# Altium PCB PCB.PcbDoc (part 1 of 2)
Units mm, origin at the board's own origin, x right, y up, seen from the top; angles counter-clockwise.
Board outline 50 x 50 mm, 4 copper layers (Top Layer, VCC, GND, Bottom Layer), stack 1.586 mm thick; 85 components, 151 nets, 720 pads, 300 vias.
Unrouted connection lines stored in the file: 6.
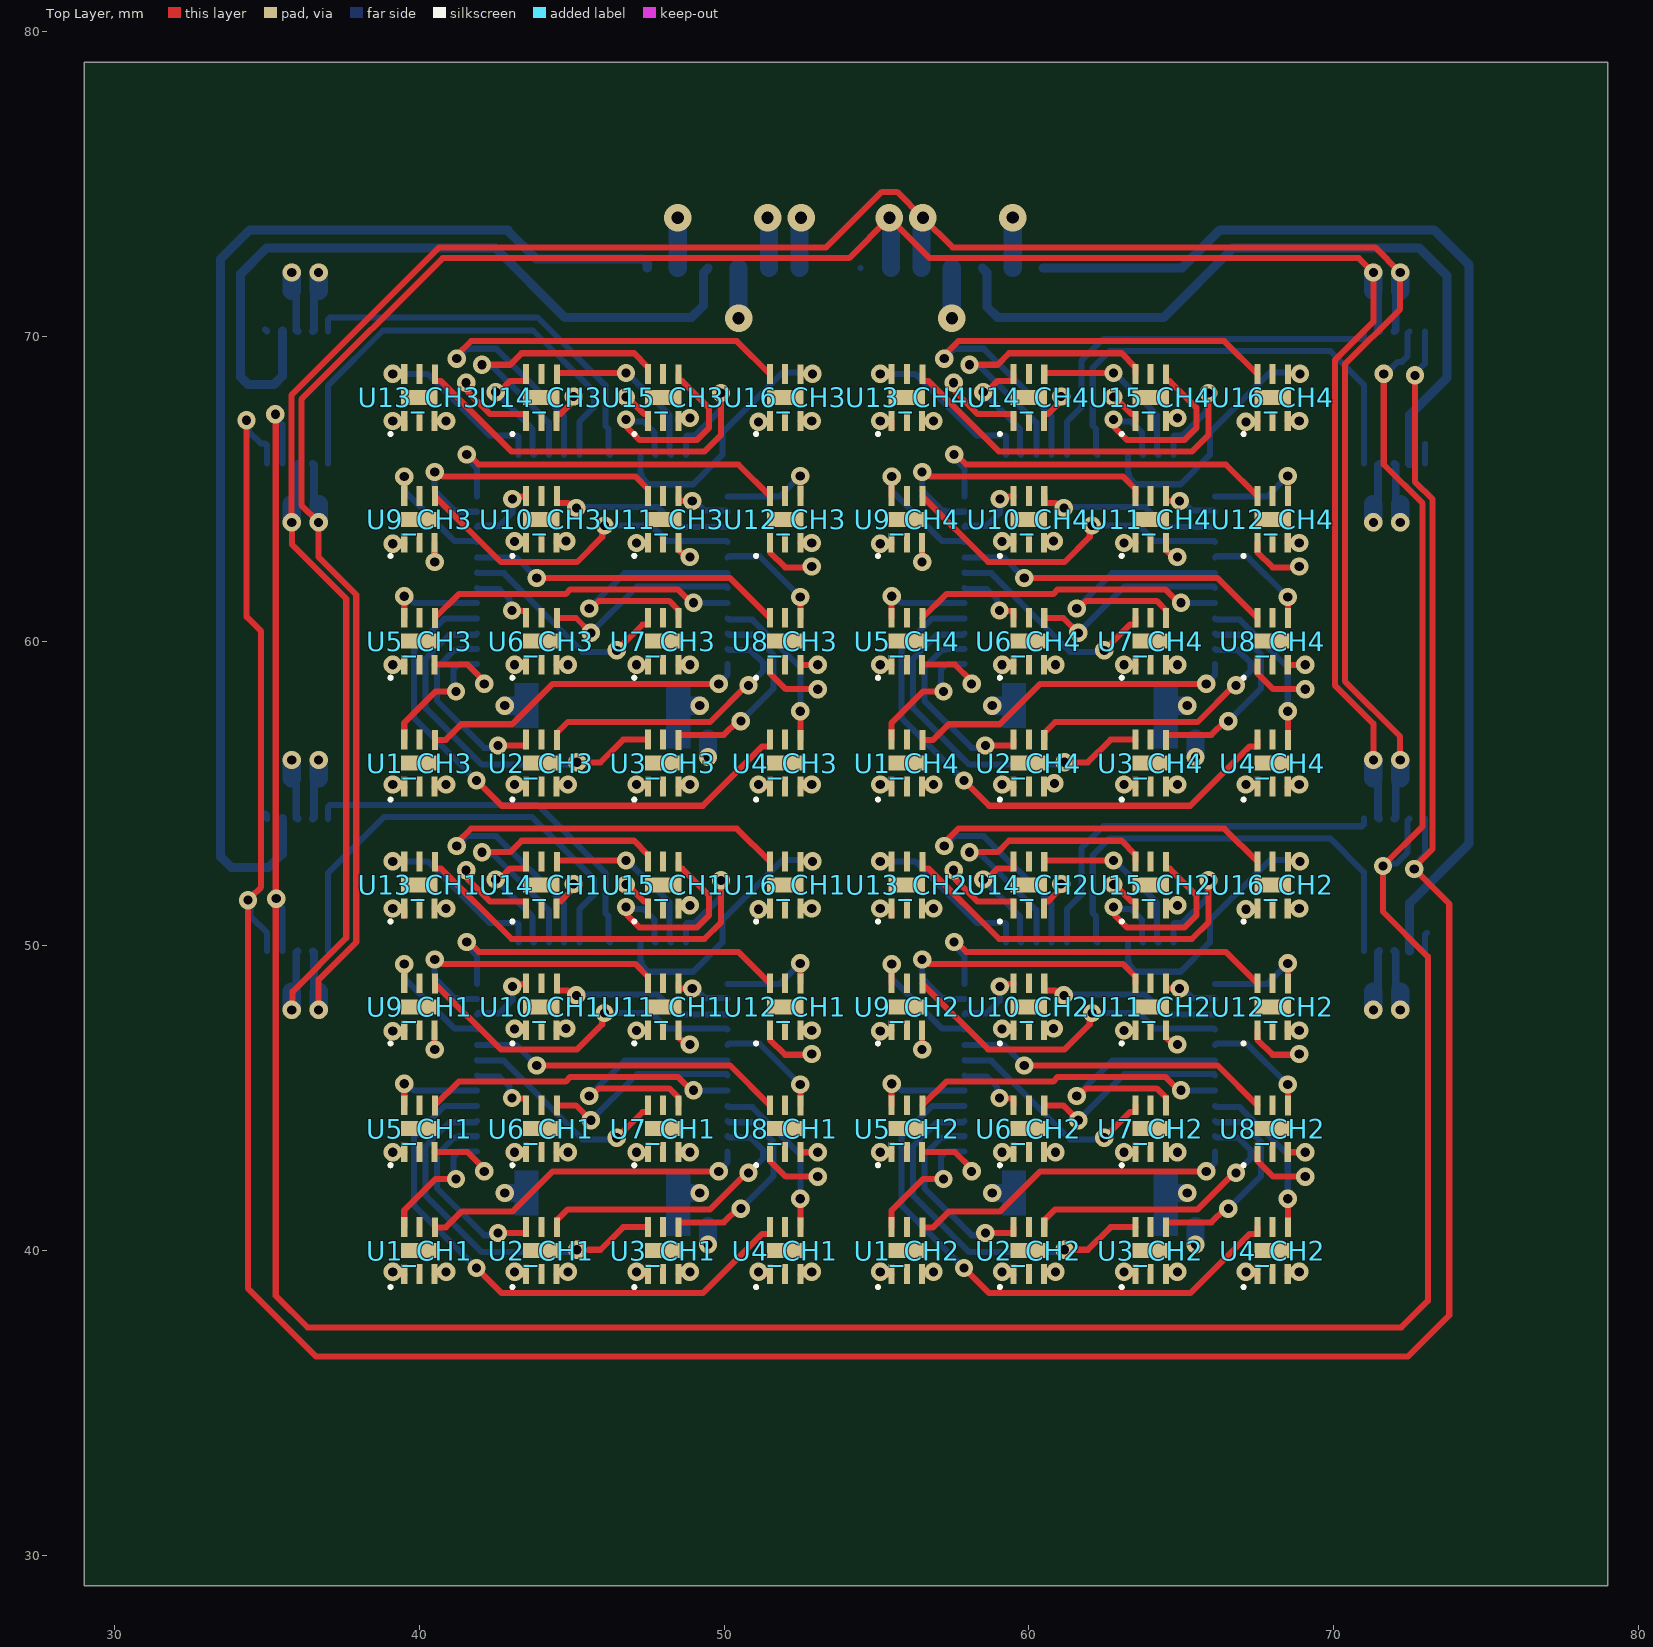
[diagram p0: Top Layer view]
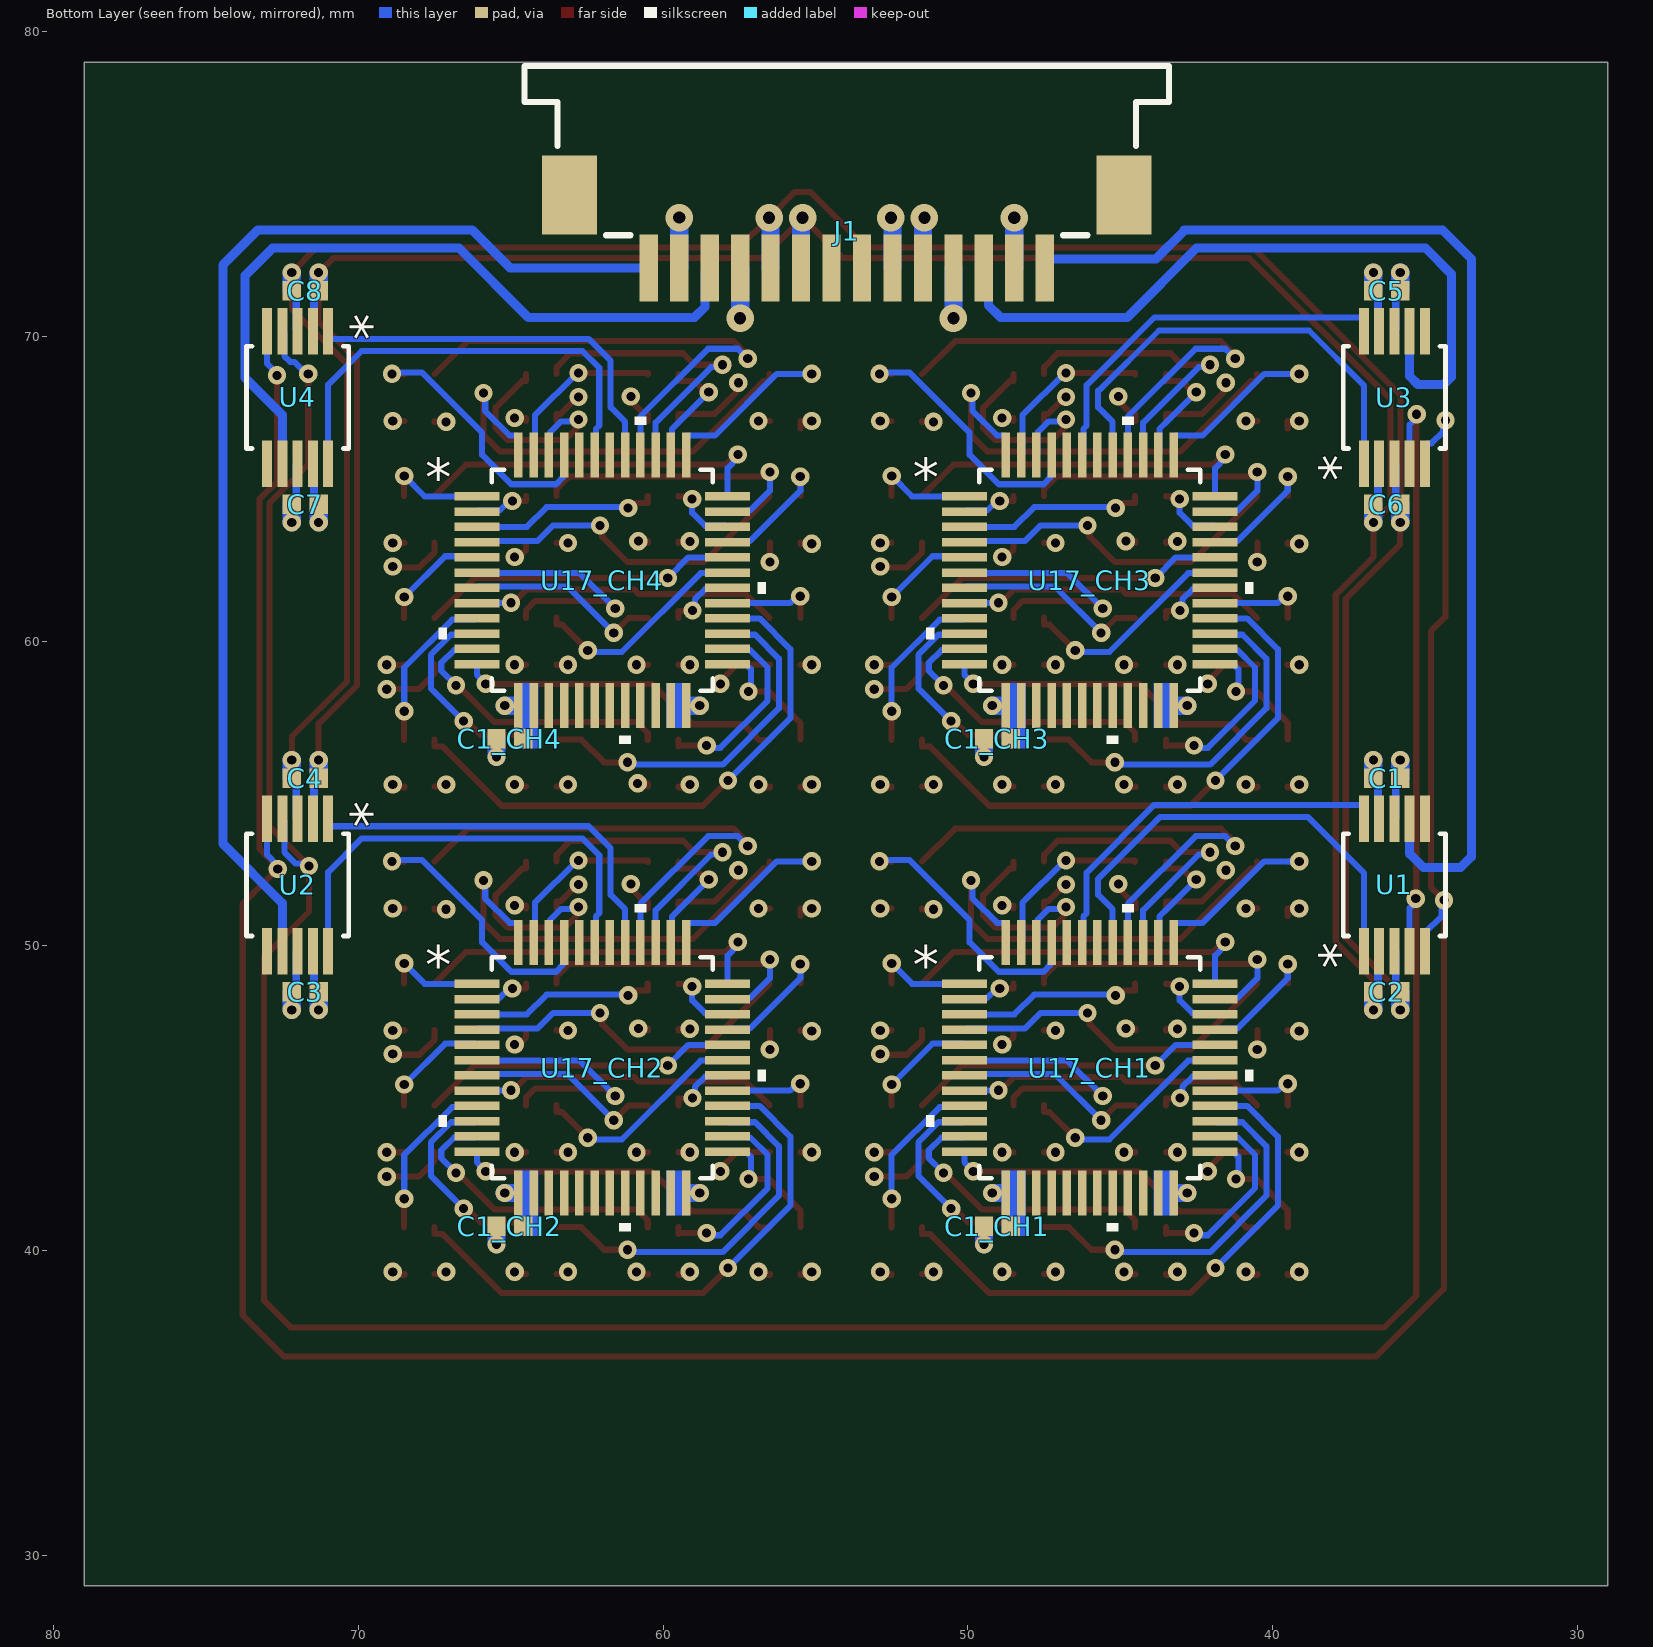
[diagram p1: Bottom Layer view, seen from below]
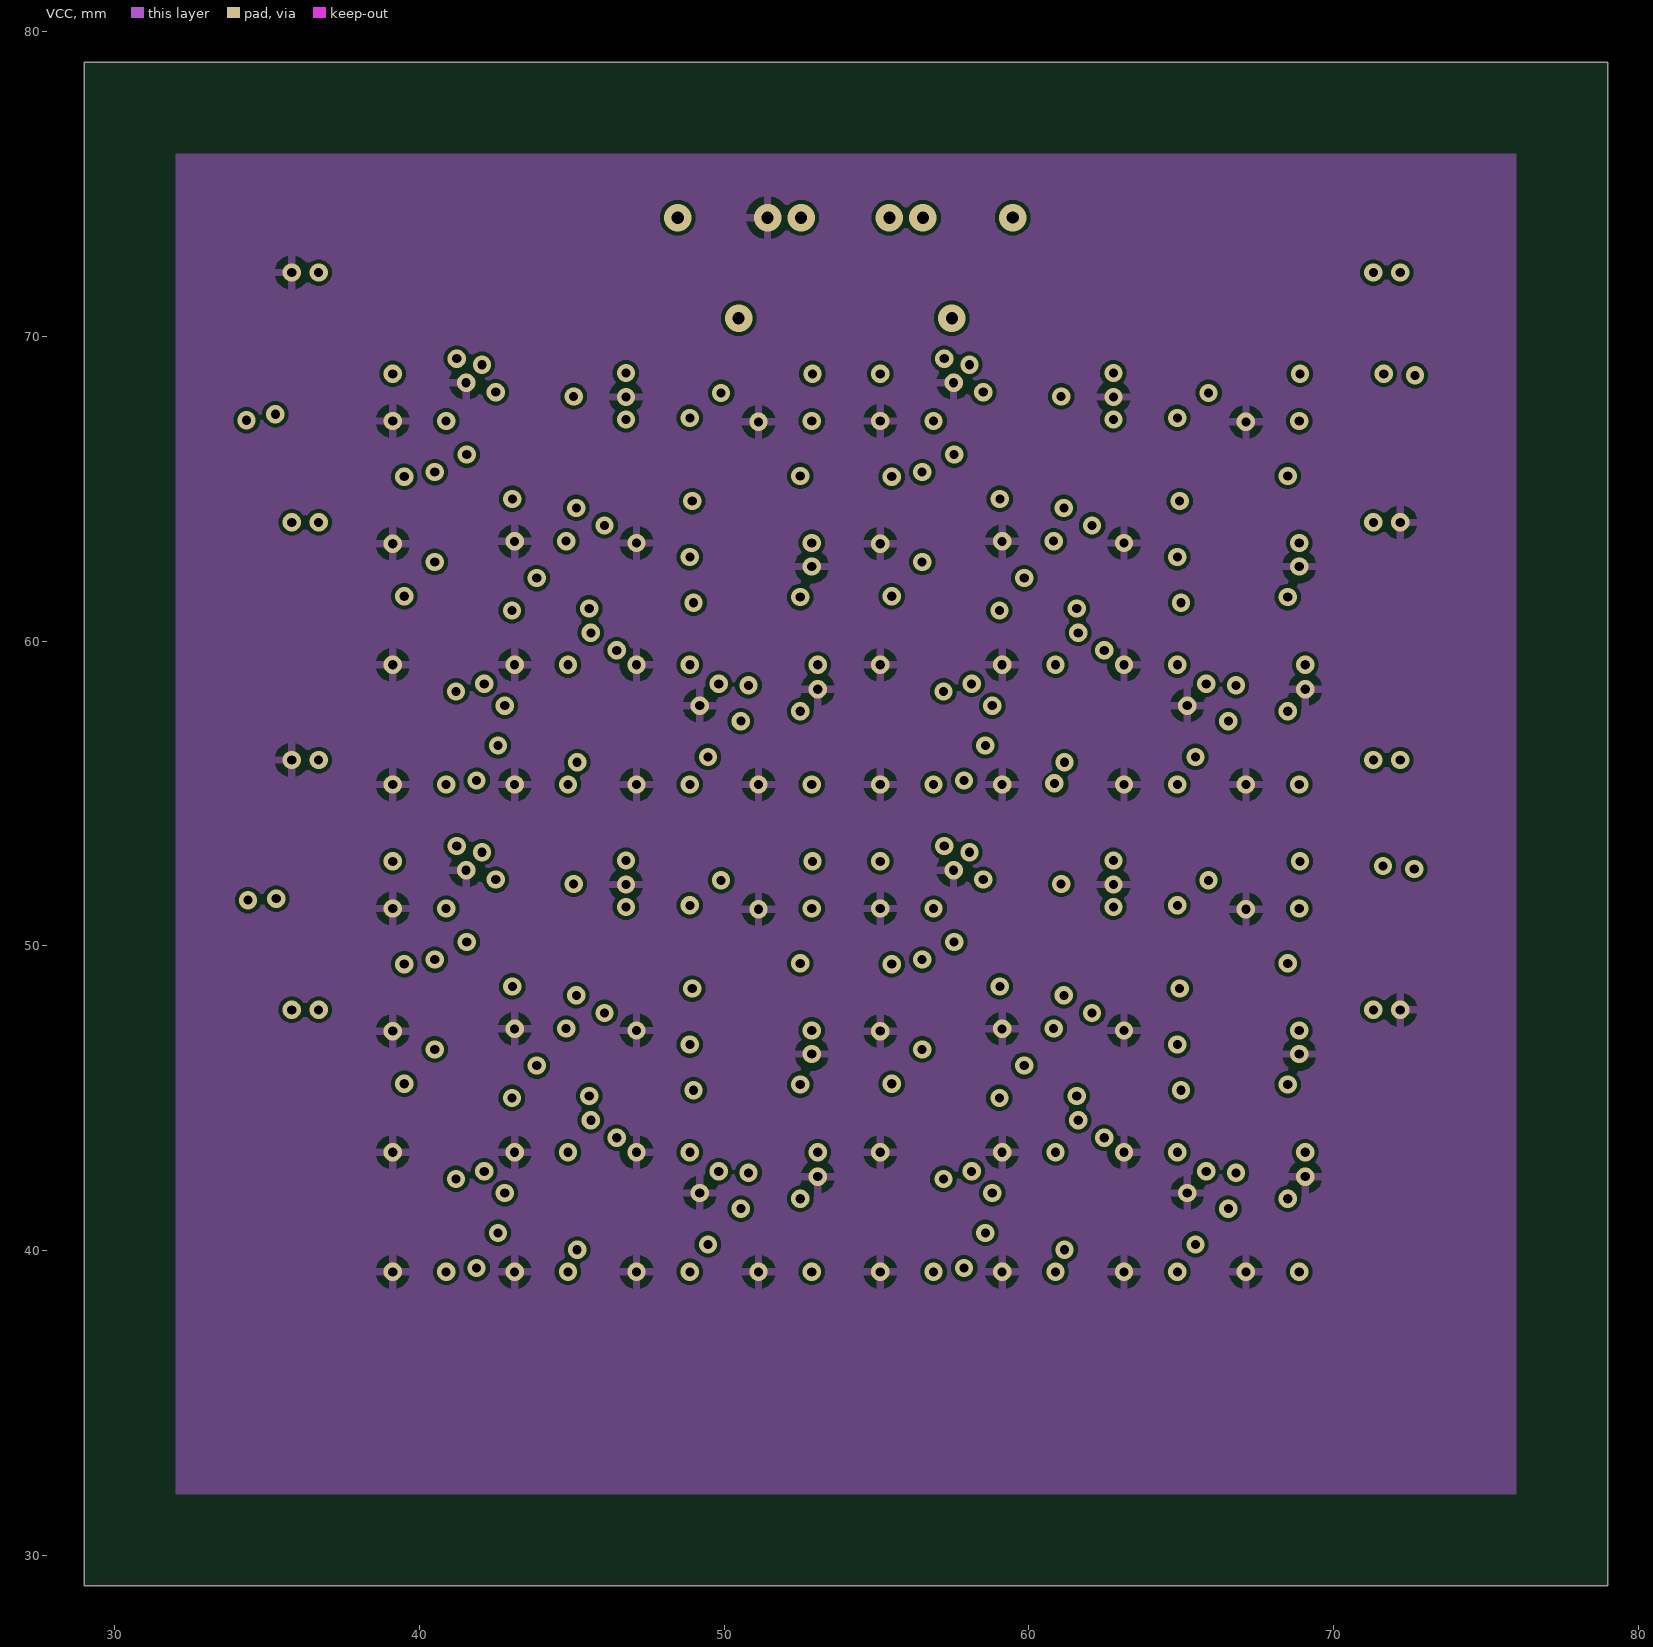
[diagram p2: VCC]
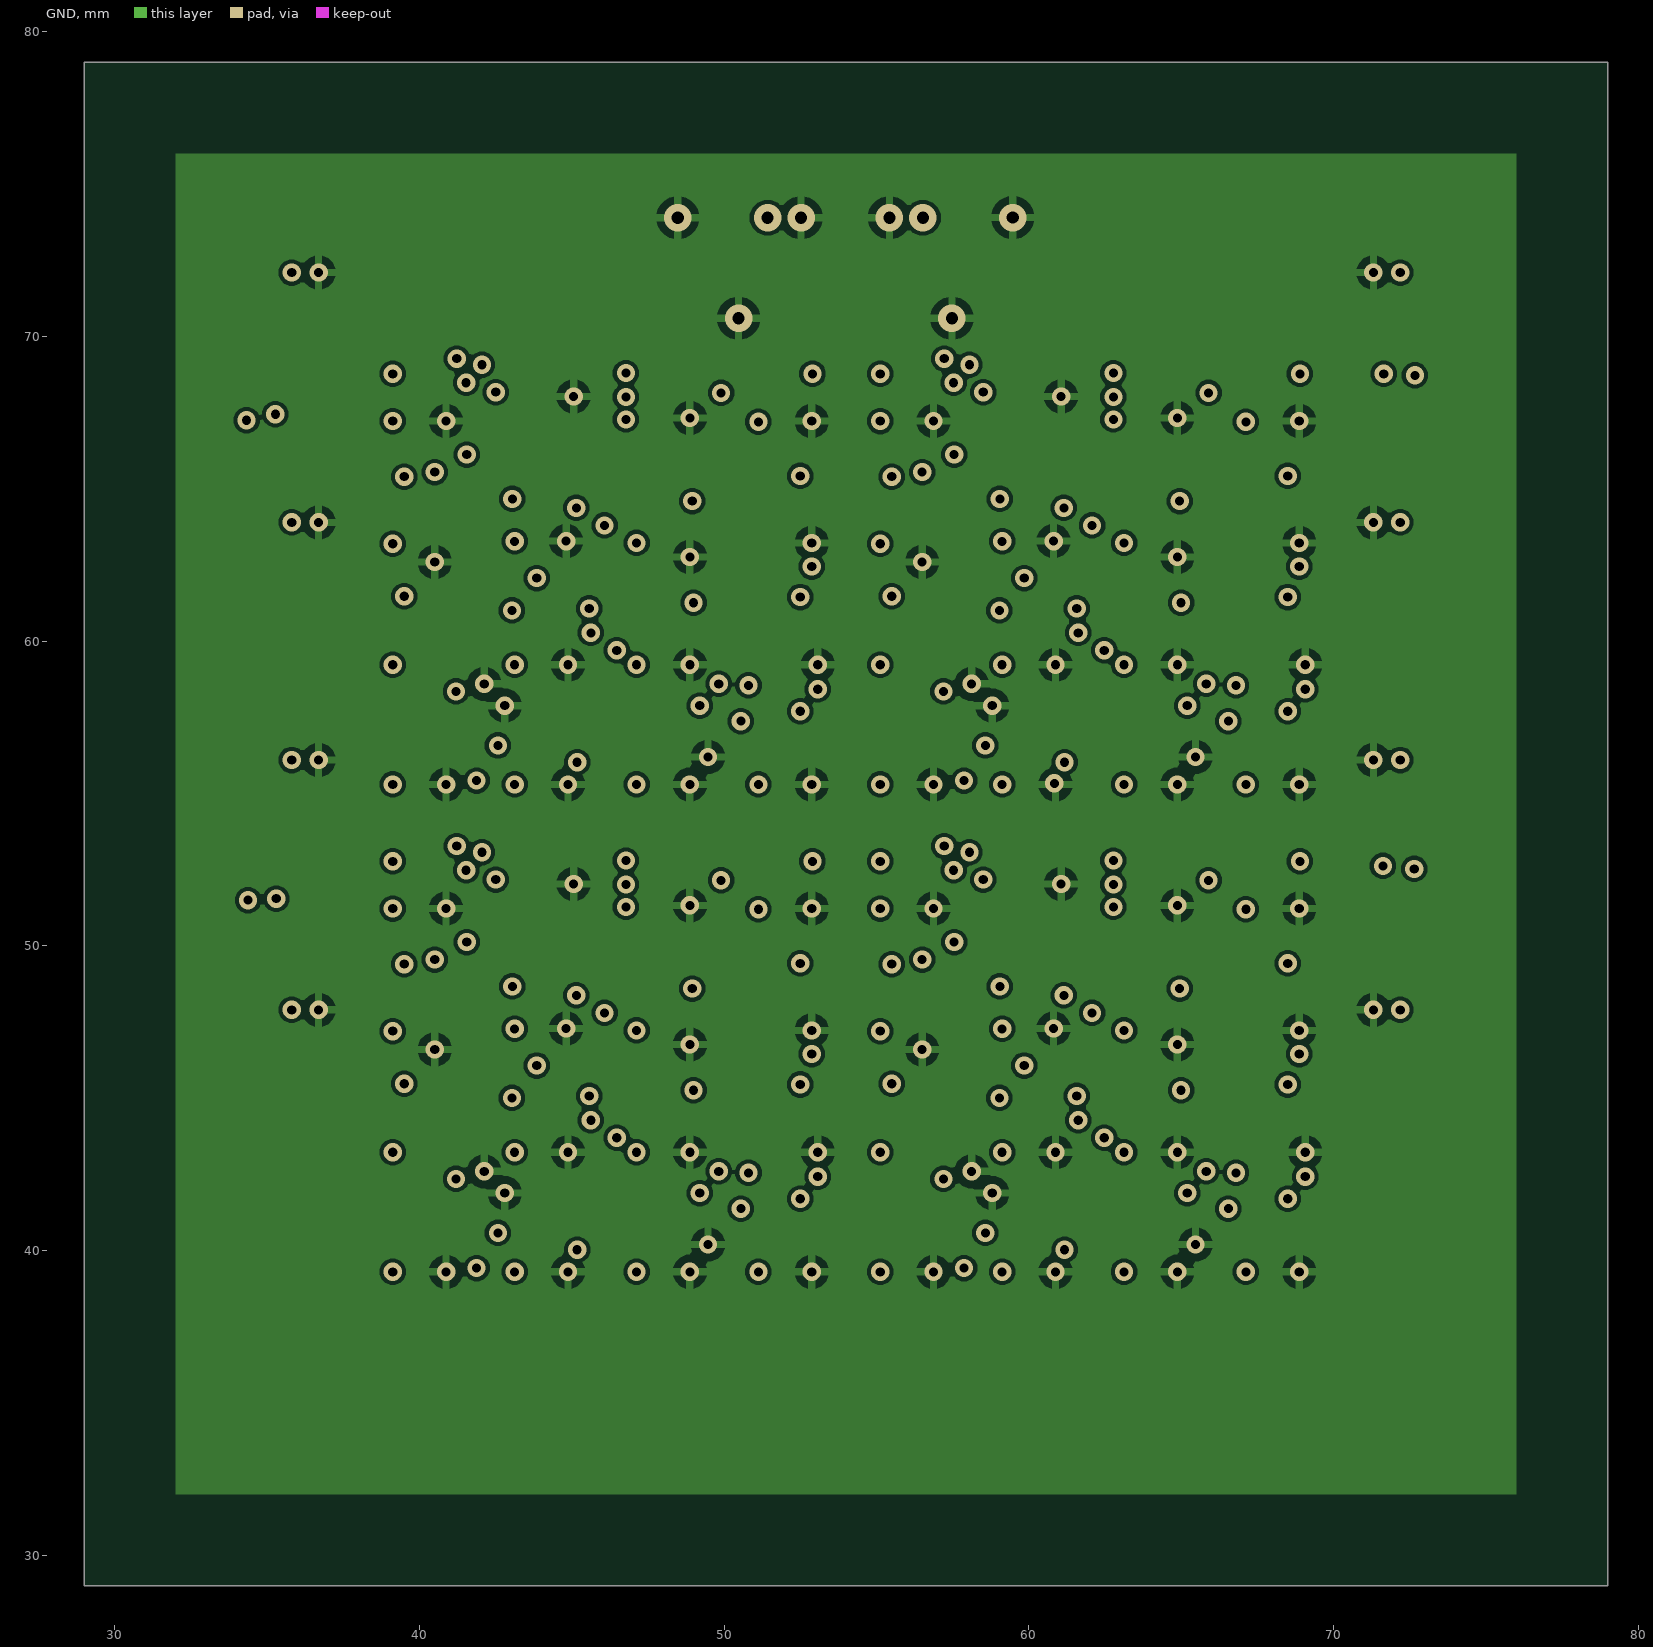
[diagram p3: GND]
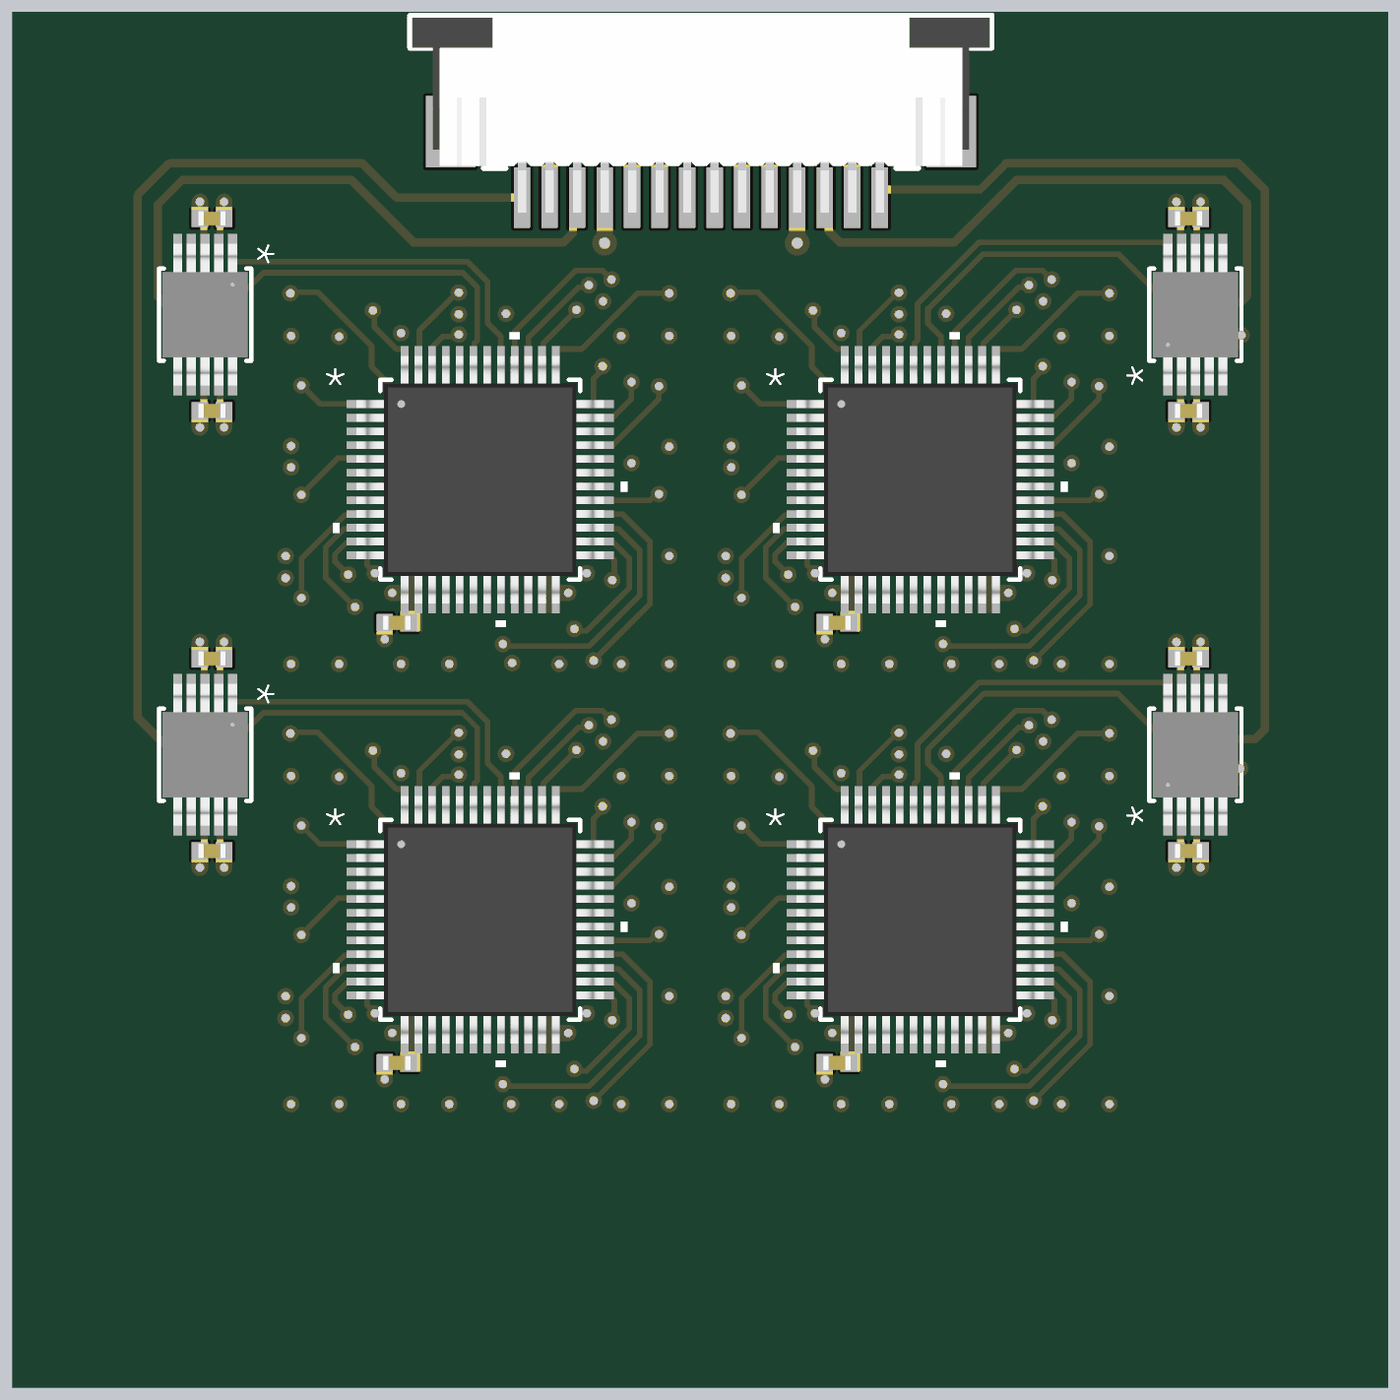
[diagram p5: 3D render of the assembled board from below, using the file's embedded part models]

## Layer stack, top to bottom
Top Solder: solder mask 0.0102, Solder Resist, Dk 3.5
Top Layer: signal copper 0.035
Dielectric 2: prepreg 0.2104, PP-006, Dk 4.6
VCC: signal copper 0.0152
Dielectric 1: dielectric 1.065, FR-4, Dk 4.6
GND: signal copper 0.0152
Dielectric 3: prepreg 0.2104, PP-006, Dk 4.6
Bottom Layer: signal copper 0.035
Bottom Solder: solder mask 0.0102, Solder Resist, Dk 3.5

## Board outline
29,29 29,79 79,79 79,29

## Design rules (kind name [scope] priority, off if disabled: settings)
Clearance [All] p1: gap=0.127 ignorepadtopadclearanceinfootprint=FALSE
HoleSize [All] p1: absolutevalues=TRUE maxlimit=2.54 minlimit=0.2 maxpercent=80.000 minpercent=20.000
PolygonConnect [All] p1: connectstyle=Relief reliefconductorwidth=0.254 reliefentries=4 polygonreliefangle="90 Angle" airgapwidth=0.254
RoomDefinition CH4 [InComponentClass('CH4')] p1: confinementstyle=ConfineIn formatcopy=TRUE lockcomponents=FALSE outline 54,54 70,54 70,70 54,70
RoomDefinition CH1 [InComponentClass('CH1')] p2: confinementstyle=ConfineIn formatcopy=TRUE lockcomponents=FALSE outline 38,38 54,38 54,54 38,54
RoomDefinition CH3 [InComponentClass('CH3')] p3: confinementstyle=ConfineIn formatcopy=TRUE lockcomponents=FALSE outline 38,54 54,54 54,70 38,70
RoomDefinition CH2 [InComponentClass('CH2')] p4: confinementstyle=ConfineIn formatcopy=TRUE lockcomponents=FALSE outline 54,38 70,38 70,54 54,54
RoutingVias [All] p1: holewidth=0.3 width=0.7 viastyle="Through Hole" minholewidth=0.2 minwidth=0.4 maxholewidth=0.711 maxwidth=1.27
SolderMaskExpansion SolderMaskExpansion_Via [IsVia] p1: expansion=0.102 istentingtop=TRUE
SolderMaskExpansion [All] p2: expansion=0.102 istentingtop=FALSE
Width [All] p1: maxlimit=0.7 minlimit=0.1 preferedwidth=0.2
29 further rules are at their usual default settings.

## Classes and differential pairs
component class CT100-array: C1 C2 C3 C4 C5 C6 C7 C8 J1 U1 U2 U3 U4
channel class CT100-channel: CH1 CH2 CH3 CH4
component class CH4: C1_CH4 U1_CH4 U2_CH4 U3_CH4 U4_CH4 U5_CH4 U6_CH4 U7_CH4 U8_CH4 U9_CH4 U10_CH4 U11_CH4 U12_CH4 U13_CH4 U14_CH4 U15_CH4 U16_CH4 U17_CH4
component class CH3: C1_CH3 U1_CH3 U2_CH3 U3_CH3 U4_CH3 U5_CH3 U6_CH3 U7_CH3 U8_CH3 U9_CH3 U10_CH3 U11_CH3 U12_CH3 U13_CH3 U14_CH3 U15_CH3 U16_CH3 U17_CH3
component class CH2: C1_CH2 U1_CH2 U2_CH2 U3_CH2 U4_CH2 U5_CH2 U6_CH2 U7_CH2 U8_CH2 U9_CH2 U10_CH2 U11_CH2 U12_CH2 U13_CH2 U14_CH2 U15_CH2 U16_CH2 U17_CH2
component class CH1: C1_CH1 U1_CH1 U2_CH1 U3_CH1 U4_CH1 U5_CH1 U6_CH1 U7_CH1 U8_CH1 U9_CH1 U10_CH1 U11_CH1 U12_CH1 U13_CH1 U14_CH1 U15_CH1 U16_CH1 U17_CH1

## Components (designator, comment, footprint, x,y, rotation, side; value= is the part's Value field where it differs from the comment)
C1 "0u1" CAP_0402 36.25,55.5 r0 bottom
C1_CH1 "0u1" CAP_0402 49.03,40.8 r180 bottom (schematic designator C1)
C1_CH2 "0u1" CAP_0402 65.03,40.8 r180 bottom (schematic designator C1)
C1_CH3 "0u1" CAP_0402 49.03,56.8 r180 bottom (schematic designator C1)
C1_CH4 "0u1" CAP_0402 65.03,56.8 r180 bottom (schematic designator C1)
C2 "0u1" CAP_0402 36.25,48.5 r0 bottom
C3 "0u1" CAP_0402 71.75,48.5 r180 bottom
C4 "0u1" CAP_0402 71.75,55.5 r180 bottom
C5 "0u1" CAP_0402 36.25,71.5 r0 bottom
C6 "0u1" CAP_0402 36.25,64.5 r0 bottom
C7 "0u1" CAP_0402 71.75,64.5 r180 bottom
C8 "0u1" CAP_0402 71.75,71.5 r180 bottom
J1 "FPC_pitch1_14pos" FPC_pitch1_14pos 53.975,76.1 r0 bottom
U1 "AD8253ARMZ" RM_10_ADI 36,52 r90 bottom
U1_CH1 "CT100" SON_6_CT100 40,40 r90 top (schematic designator U1)
U1_CH2 "CT100" SON_6_CT100 56,40 r90 top (schematic designator U1)
U1_CH3 "CT100" SON_6_CT100 40,56 r90 top (schematic designator U1)
U1_CH4 "CT100" SON_6_CT100 56,56 r90 top (schematic designator U1)
U2 "AD8253ARMZ" RM_10_ADI 72,52 r270 bottom
U2_CH1 "CT100" SON_6_CT100 44,40 r90 top (schematic designator U2)
U2_CH2 "CT100" SON_6_CT100 60,40 r90 top (schematic designator U2)
U2_CH3 "CT100" SON_6_CT100 44,56 r90 top (schematic designator U2)
U2_CH4 "CT100" SON_6_CT100 60,56 r90 top (schematic designator U2)
U3 "AD8253ARMZ" RM_10_ADI 36,68 r90 bottom
U3_CH1 "CT100" SON_6_CT100 48,40 r90 top (schematic designator U3)
U3_CH2 "CT100" SON_6_CT100 64,40 r90 top (schematic designator U3)
U3_CH3 "CT100" SON_6_CT100 48,56 r90 top (schematic designator U3)
U3_CH4 "CT100" SON_6_CT100 64,56 r90 top (schematic designator U3)
U4 "AD8253ARMZ" RM_10_ADI 72,68 r270 bottom
U4_CH1 "CT100" SON_6_CT100 52,40 r90 top (schematic designator U4)
U4_CH2 "CT100" SON_6_CT100 68,40 r90 top (schematic designator U4)
U4_CH3 "CT100" SON_6_CT100 52,56 r90 top (schematic designator U4)
U4_CH4 "CT100" SON_6_CT100 68,56 r90 top (schematic designator U4)
U5_CH1 "CT100" SON_6_CT100 40,44 r90 top (schematic designator U5)
U5_CH2 "CT100" SON_6_CT100 56,44 r90 top (schematic designator U5)
U5_CH3 "CT100" SON_6_CT100 40,60 r90 top (schematic designator U5)
U5_CH4 "CT100" SON_6_CT100 56,60 r90 top (schematic designator U5)
U6_CH1 "CT100" SON_6_CT100 44,44 r90 top (schematic designator U6)
U6_CH2 "CT100" SON_6_CT100 60,44 r90 top (schematic designator U6)
U6_CH3 "CT100" SON_6_CT100 44,60 r90 top (schematic designator U6)
U6_CH4 "CT100" SON_6_CT100 60,60 r90 top (schematic designator U6)
U7_CH1 "CT100" SON_6_CT100 48,44 r90 top (schematic designator U7)
U7_CH2 "CT100" SON_6_CT100 64,44 r90 top (schematic designator U7)
U7_CH3 "CT100" SON_6_CT100 48,60 r90 top (schematic designator U7)
U7_CH4 "CT100" SON_6_CT100 64,60 r90 top (schematic designator U7)
U8_CH1 "CT100" SON_6_CT100 52,44 r90 top (schematic designator U8)
U8_CH2 "CT100" SON_6_CT100 68,44 r90 top (schematic designator U8)
U8_CH3 "CT100" SON_6_CT100 52,60 r90 top (schematic designator U8)
U8_CH4 "CT100" SON_6_CT100 68,60 r90 top (schematic designator U8)
U9_CH1 "CT100" SON_6_CT100 40,48 r90 top (schematic designator U9)
U9_CH2 "CT100" SON_6_CT100 56,48 r90 top (schematic designator U9)
U9_CH3 "CT100" SON_6_CT100 40,64 r90 top (schematic designator U9)
U9_CH4 "CT100" SON_6_CT100 56,64 r90 top (schematic designator U9)
U10_CH1 "CT100" SON_6_CT100 44,48 r90 top (schematic designator U10)
U10_CH2 "CT100" SON_6_CT100 60,48 r90 top (schematic designator U10)
U10_CH3 "CT100" SON_6_CT100 44,64 r90 top (schematic designator U10)
U10_CH4 "CT100" SON_6_CT100 60,64 r90 top (schematic designator U10)
U11_CH1 "CT100" SON_6_CT100 48,48 r90 top (schematic designator U11)
U11_CH2 "CT100" SON_6_CT100 64,48 r90 top (schematic designator U11)
U11_CH3 "CT100" SON_6_CT100 48,64 r90 top (schematic designator U11)
U11_CH4 "CT100" SON_6_CT100 64,64 r90 top (schematic designator U11)
U12_CH1 "CT100" SON_6_CT100 52,48 r90 top (schematic designator U12)
U12_CH2 "CT100" SON_6_CT100 68,48 r90 top (schematic designator U12)
U12_CH3 "CT100" SON_6_CT100 52,64 r90 top (schematic designator U12)
U12_CH4 "CT100" SON_6_CT100 68,64 r90 top (schematic designator U12)
U13_CH1 "CT100" SON_6_CT100 40,52 r90 top (schematic designator U13)
U13_CH2 "CT100" SON_6_CT100 56,52 r90 top (schematic designator U13)
U13_CH3 "CT100" SON_6_CT100 40,68 r90 top (schematic designator U13)
U13_CH4 "CT100" SON_6_CT100 56,68 r90 top (schematic designator U13)
U14_CH1 "CT100" SON_6_CT100 44,52 r90 top (schematic designator U14)
U14_CH2 "CT100" SON_6_CT100 60,52 r90 top (schematic designator U14)
U14_CH3 "CT100" SON_6_CT100 44,68 r90 top (schematic designator U14)
U14_CH4 "CT100" SON_6_CT100 60,68 r90 top (schematic designator U14)
U15_CH1 "CT100" SON_6_CT100 48,52 r90 top (schematic designator U15)
U15_CH2 "CT100" SON_6_CT100 64,52 r90 top (schematic designator U15)
U15_CH3 "CT100" SON_6_CT100 48,68 r90 top (schematic designator U15)
U15_CH4 "CT100" SON_6_CT100 64,68 r90 top (schematic designator U15)
U16_CH1 "CT100" SON_6_CT100 52,52 r90 top (schematic designator U16)
U16_CH2 "CT100" SON_6_CT100 68,52 r90 top (schematic designator U16)
U16_CH3 "CT100" SON_6_CT100 52,68 r90 top (schematic designator U16)
U16_CH4 "CT100" SON_6_CT100 68,68 r90 top (schematic designator U16)
U17_CH1 "ADG725" SU_48_ADI 46,46 r180 bottom (schematic designator U17)
U17_CH2 "ADG725" SU_48_ADI 62,46 r180 bottom (schematic designator U17)
U17_CH3 "ADG725" SU_48_ADI 46,62 r180 bottom (schematic designator U17)
U17_CH4 "ADG725" SU_48_ADI 62,62 r180 bottom (schematic designator U17)

## Footprints (in the part's own frame and the unit in brackets; to place one, negate y for a bottom-side part, rotate by r counter-clockwise, add the part's x,y. Pads: shape width x height; smd on the part's side, far side on the other; paste and mask are expansions set on the pad)
CAP_0402 [mm] "Chip Capacitor, 2-Leads, Body 1.02x0.51mm, IPC Medium Density"
  rect 0.6x0.64 smd: 1(-0.44,0) 2(0.44,0)
  body extent -0.5,-0.26 0.5,0.26, height 0.52
FPC_pitch1_14pos [mm]
  rect 0.6x2.2 smd: 1(-6.5,3.85) 2(-5.5,3.85) 3(-4.5,3.85) 4(-3.5,3.85) 5(-2.5,3.85) 6(-1.5,3.85) 7(-0.5,3.85) 8(0.5,3.85) 9(1.5,3.85) 10(2.5,3.85) 11(3.5,3.85) 12(4.5,3.85) 13(5.5,3.85) 14(6.5,3.85)
  rect 1.8x2.6 smd: MP1(-9.1,1.45) MP2(9.1,1.45)
  silkscreen extent -10.58,-2.78 10.58,2.78, body extent -10.5,-2.7 10.5,4.4, height 3.02
RM_10_ADI [mil]
  rect 60x13 smd paste+0 mask+0: 1(-85.5,39.37) 2(-85.5,19.69) 3(-85.5,0) 4(-85.5,-19.68) 5(-85.5,-39.37) 6(85.5,-39.37) 7(85.5,-19.68) 8(85.5,0) 9(85.5,19.69) 10(85.5,39.37)
  silkscreen extent -66,-66 66,66, body extent -101,-61 101,61, height 43
SON_6_CT100 [mm] "SON, 6-Leads, Body 1.50x1.50mm, Pitch 0.50mm, Thermal Pad 1.20x0.49mm, IPC Medium Density"
  rect 0.65x0.2 smd mask+0.076: 1(-0.77,0.5) 2(-0.77,0) 3(-0.77,-0.5) 4(0.762,-0.508) 5(0.77,0) 6(0.77,0.5)
  rect 0.49x1.2 smd mask+0.076: 7(0,0)
  silkscreen extent -1.25,0.9 -1.15,1, body extent -0.8,-0.8 0.8,0.8, height 0.5
SU_48_ADI [mil]
  rect 58x11 smd paste+0 mask+0: 1(-162,108.27) 2(-162,88.58) 3(-162,68.9) 4(-162,49.21) 5(-162,29.53) 6(-162,9.84) 7(-162,-9.84) 8(-162,-29.53) 9(-162,-49.21) 10(-162,-68.9) 11(-162,-88.58) 12(-162,-108.27) 25(162,-108.27) 26(162,-88.58) 27(162,-68.9) 28(162,-49.21) 29(162,-29.53) 30(162,-9.84) 31(162,9.84) 32(162,29.53) 33(162,49.21) 34(162,68.9) 35(162,88.58) 36(162,108.27)
  rect 11x58 smd paste+0 mask+0: 13(-108.27,-162) 14(-88.58,-162) 15(-68.9,-162) 16(-49.21,-162) 17(-29.53,-162) 18(-9.84,-162) 19(9.84,-162) 20(29.53,-162) 21(49.21,-162) 22(68.9,-162) 23(88.58,-162) 24(108.27,-162) 37(108.27,162) 38(88.58,162) 39(68.9,162) 40(49.21,162) 41(29.53,162) 42(9.84,162) 43(-9.84,162) 44(-29.53,162) 45(-49.21,162) 46(-68.9,162) 47(-88.58,162) 48(-108.27,162)
  silkscreen extent -211,-211 211,211, body extent -177,-177 177,177, height 47

## Part data
C1 C1_CH1 C1_CH2 C1_CH3 C1_CH4 C2 C3 C4 C5 C6 C7 C8: library part CAP_0402, "Capacitor SMD 0402", Voltage=50V, Capacitance=0u1
J1: "14 Position 1 mm FFC & FPC Connectors"
U1 U2 U3 U4: "No Description Available", Mfr_Name="Analog Devices Inc", Copyright="Copyright (C) 2023 Ultra Librarian. All rights reserved.", Manufacturer_Part_Number=AD8253ARMZ, RefDes=RefDes, Type=DEV
U1_CH1 U1_CH2 U1_CH3 U1_CH4 U2_CH1 U2_CH2 U2_CH3 U2_CH4 U3_CH1 U3_CH2 U3_CH3 U3_CH4 U4_CH1 U4_CH2 U4_CH3 U4_CH4 U5_CH1 U5_CH2 U5_CH3 U5_CH4 U6_CH1 U6_CH2 U6_CH3 U6_CH4 U7_CH1 U7_CH2 U7_CH3 U7_CH4 U8_CH1 U8_CH2 U8_CH3 U8_CH4 U9_CH1 U9_CH2 U9_CH3 U9_CH4 U10_CH1 U10_CH2 U10_CH3 U10_CH4 U11_CH1 U11_CH2 U11_CH3 U11_CH4 U12_CH1 U12_CH2 U12_CH3 U12_CH4 U13_CH1 U13_CH2 U13_CH3 U13_CH4 U14_CH1 U14_CH2 U14_CH3 U14_CH4 U15_CH1 U15_CH2 U15_CH3 U15_CH4 U16_CH1 U16_CH2 U16_CH3 U16_CH4: library part CT100LW-ID6-M, "TMR Sensor, Linear, -40 to 85deg C", Manufacturer="Crocus Technology", Manufacturer Part Number=CT100LW-ID6, RoHS=Yes
U17_CH1 U17_CH2 U17_CH3 U17_CH4: library part ADG725BSUZ, "Differential 16-Channel, Serially Controlled 3.5 Ω 1.8 V to 5.5 V, ±2.5 V, Analog Multiplexer", Mfr_Name="Analog Devices Inc", Manufacturer_Part_Number=ADG725BSUZ, RefDes=RefDes, Type=DEV

## Via types
v1: diameter 0.6, hole 0.3, Top Layer to Bottom Layer, tented both sides, 292 vias
v2: diameter 0.9, hole 0.4, Top Layer to Bottom Layer, tented both sides, 8 vias

## Nets (pads, with @x,y where several pads share a name; then routed paths per layer and width w, separated by ;. In a path a pad name is that pad's centre, name@x,y a point inside that pad or via, vN(x,y) a via of type N, cw(c..) or ccw(c..) an arc to the next point about the centre after c; other vN are vias at no path point)
+5V: C1.1 C1_CH1.2 C1_CH2.2 C1_CH3.2 C1_CH4.2 C3.1 C5.1 C7.1 J1.5 U1.8 U1_CH1.1 U1_CH2.1 U1_CH3.1 U1_CH4.1 U2.8 U2_CH1.1 U2_CH2.1 U2_CH3.1 U2_CH4.1 U3.8 U3_CH1.1 U3_CH2.1 U3_CH3.1 U3_CH4.1 U4.8 U4_CH1.1 U4_CH2.1 U4_CH3.1 U4_CH4.1 U5_CH1.1 U5_CH2.1 U5_CH3.1 U5_CH4.1 U6_CH1.1 U6_CH2.1 U6_CH3.1 U6_CH4.1 U7_CH1.1 U7_CH2.1 U7_CH3.1 U7_CH4.1 U8_CH1.1 U8_CH2.1 U8_CH3.1 U8_CH4.1 U9_CH1.1 U9_CH2.1 U9_CH3.1 U9_CH4.1 U10_CH1.1 U10_CH2.1 U10_CH3.1 U10_CH4.1 U11_CH1.1 U11_CH2.1 U11_CH3.1 U11_CH4.1 U12_CH1.1 U12_CH2.1 U12_CH3.1 U12_CH4.1 U13_CH1.1 U13_CH2.1 U13_CH3.1 U13_CH4.1 U14_CH1.1 U14_CH2.1 U14_CH3.1 U14_CH4.1 U15_CH1.1 U15_CH2.1 U15_CH3.1 U15_CH4.1 U16_CH1.1 U16_CH2.1 U16_CH3.1 U16_CH4.1 U17_CH1.13 U17_CH1.14 U17_CH2.13 U17_CH2.14 U17_CH3.13 U17_CH3.14 U17_CH4.13 U17_CH4.14 | length 63.9
  Top Layer w0.2: v1@39.125,39.2 39.5,39.2 U1_CH1.1@39.5,39.23 ; v1(39.125,43.225) 39.5,43.225 U5_CH1.1@39.5,43.23 ; v1(39.125,47.2) 39.5,47.2 U9_CH1.1@39.5,47.23 ; v1(39.125,51.225) 39.5,51.225 U13_CH1.1@39.5,51.23 U13_CH1.1@39.5,50.984 ; v1@39.125,55.2 39.5,55.2 U1_CH3.1@39.5,55.23 ; v1(39.125,59.225) 39.5,59.225 U5_CH3.1@39.5,59.23 ; v1(39.125,63.2) 39.5,63.2 U9_CH3.1@39.5,63.23 ; v1(39.125,67.225) 39.5,67.225 U13_CH3.1@39.5,67.23 U13_CH3.1@39.5,66.984 ; v1(41.533,52.483) 41.602,52.414 41.602,52.173 42.32,51.455 43.5,51.455 U14_CH1.1@43.5,51.23 ; v1(41.533,68.483) 41.602,68.414 41.602,68.173 42.32,67.455 43.5,67.455 U14_CH3.1@43.5,67.23 ; v1@43.125,39.2 43.5,39.2 U2_CH1.1@43.5,39.23 ; v1(43.125,43.225) 43.5,43.225 U6_CH1.1@43.5,43.23 ; v1(43.125,47.277) 43.5,47.277 U10_CH1.1@43.5,47.23 ; v1@43.125,55.2 43.5,55.2 U2_CH3.1@43.5,55.23 ; v1(43.125,59.225) 43.5,59.225 U6_CH3.1@43.5,59.23 ; v1(43.125,63.277) 43.5,63.277 U10_CH3.1@43.5,63.23 ; v1(46.777,52.013) 46.821,52.013 47.379,51.455 47.5,51.455 U15_CH1.1@47.5,51.23 ; v1(46.777,68.013) 46.821,68.013 47.379,67.455 47.5,67.455 U15_CH3.1@47.5,67.23 ; v1@47.125,39.225 47.5,39.225 U3_CH1.1@47.5,39.23 ; v1(47.125,43.225) 47.5,43.225 U7_CH1.1@47.5,43.23 ; v1(47.125,47.225) 47.5,47.225 U11_CH1.1@47.5,47.23 ; v1@47.125,55.225 47.5,55.225 U3_CH3.1@47.5,55.23 ; v1(47.125,59.225) 47.5,59.225 U7_CH3.1@47.5,59.23 ; v1(47.125,63.225) 47.5,63.225 U11_CH3.1@47.5,63.23 ; v1@51.125,39.225 51.5,39.225 U4_CH1.1@51.5,39.23 ; v1(51.125,51.2) 51.5,51.2 U16_CH1.1@51.5,51.23 ; v1@51.125,55.225 51.5,55.225 U4_CH3.1@51.5,55.23 ; v1(51.125,67.2) 51.5,67.2 U16_CH3.1@51.5,67.23 ; U8_CH1.1@51.5,43.23 51.5,42.95 52.025,42.425 v1(53.075,42.425) ; U12_CH1.1@51.5,47.23 51.5,46.925 52,46.425 52.85,46.425 v1(52.875,46.45) ; U8_CH3.1@51.5,59.23 51.5,58.95 52.025,58.425 v1(53.075,58.425) ; U12_CH3.1@51.5,63.23 51.5,62.925 52,62.425 52.85,62.425 v1(52.875,62.45) ; v1@55.125,39.2 55.5,39.2 U1_CH2.1@55.5,39.23 ; v1(55.125,43.225) 55.5,43.225 U5_CH2.1@55.5,43.23 ; v1(55.125,47.2) 55.5,47.2 U9_CH2.1@55.5,47.23 ; v1(55.125,51.225) 55.5,51.225 U13_CH2.1@55.5,51.23 U13_CH2.1@55.5,50.984 ; v1@55.125,55.2 55.5,55.2 U1_CH4.1@55.5,55.23 ; v1(55.125,59.225) 55.5,59.225 U5_CH4.1@55.5,59.23 ; v1(55.125,63.2) 55.5,63.2 U9_CH4.1@55.5,63.23 ; v1(55.125,67.225) 55.5,67.225 U13_CH4.1@55.5,67.23 U13_CH4.1@55.5,66.984 ; v1(57.533,52.483) 57.602,52.414 57.602,52.173 58.32,51.455 59.5,51.455 U14_CH2.1@59.5,51.23 ; v1(57.533,68.483) 57.602,68.414 57.602,68.173 58.32,67.455 59.5,67.455 U14_CH4.1@59.5,67.23 ; v1@59.125,39.2 59.5,39.2 U2_CH2.1@59.5,39.23 ; v1(59.125,43.225) 59.5,43.225 U6_CH2.1@59.5,43.23 ; v1(59.125,47.277) 59.5,47.277 U10_CH2.1@59.5,47.23 ; v1@59.125,55.2 59.5,55.2 U2_CH4.1@59.5,55.23 ; v1(59.125,59.225) 59.5,59.225 U6_CH4.1@59.5,59.23 ; v1(59.125,63.277) 59.5,63.277 U10_CH4.1@59.5,63.23 ; v1(62.777,52.013) 62.821,52.013 63.379,51.455 63.5,51.455 U15_CH2.1@63.5,51.23 ; v1(62.777,68.013) 62.821,68.013 63.379,67.455 63.5,67.455 U15_CH4.1@63.5,67.23 ; v1@63.125,39.225 63.5,39.225 U3_CH2.1@63.5,39.23 ; v1(63.125,43.225) 63.5,43.225 U7_CH2.1@63.5,43.23 ; v1(63.125,47.225) 63.5,47.225 U11_CH2.1@63.5,47.23 ; v1@63.125,55.225 63.5,55.225 U3_CH4.1@63.5,55.23 ; v1(63.125,59.225) 63.5,59.225 U7_CH4.1@63.5,59.23 ; v1(63.125,63.225) 63.5,63.225 U11_CH4.1@63.5,63.23 ; v1@67.125,39.225 67.5,39.225 U4_CH2.1@67.5,39.23 ; v1(67.125,51.2) 67.5,51.2 U16_CH2.1@67.5,51.23 ; v1@67.125,55.225 67.5,55.225 U4_CH4.1@67.5,55.23 ; v1(67.125,67.2) 67.5,67.2 U16_CH4.1@67.5,67.23 ; U8_CH2.1@67.5,43.23 67.5,42.95 68.025,42.425 v1(69.075,42.425) ; U12_CH2.1@67.5,47.23 67.5,46.925 68,46.425 68.85,46.425 v1(68.875,46.45) ; U8_CH4.1@67.5,59.23 67.5,58.95 68.025,58.425 v1(69.075,58.425) ; U12_CH4.1@67.5,63.23 67.5,62.925 68,62.425 68.85,62.425 v1(68.875,62.45)
  Bottom Layer w0.25: C1.1@35.81,55.5 35.96,55.35 35.96,54.212 U1.8@36,54.172 ; C5.1@35.81,71.5 35.96,71.35 35.96,70.212 U3.8@36,70.172 ; U4.8@72,65.828 72.04,65.788 72.04,64.65 C7.1@72.19,64.5 ; C3.1@72.038,48.652 U2.8@72.038,49.79
  Bottom Layer w0.254: U2.8@72,49.828 U2.8@72.038,49.79 ; C3.1@72.038,48.652 C3.1@72.19,48.5
  Bottom Layer w0.279: C1_CH1.2@48.585,40.8 48.585,40.82 C1_CH1.2@48.75,40.985 ; C1_CH3.2@48.585,56.8 48.585,56.82 C1_CH3.2@48.75,56.985 ; C1_CH2.2@64.585,40.8 64.585,40.82 C1_CH2.2@64.75,40.985 ; C1_CH4.2@64.585,56.8 64.585,56.82 C1_CH4.2@64.75,56.985
  Bottom Layer w0.6: C1.1@35.81,55.5 v1(35.81,56.1) ; C5.1@35.81,71.5 v1(35.81,72.1) ; U17_CH1.13@48.75,41.885 v1(49.2,41.885) ; U17_CH3.13@48.75,57.885 v1(49.2,57.885) ; v2(51.425,73.9) 51.475,73.85 J1.5@51.475,72.25 ; U17_CH2.13@64.75,41.885 v1(65.2,41.885) ; U17_CH4.13@64.75,57.885 v1(65.2,57.885) ; v1(72.19,47.9) C3.1@72.19,48.5 ; v1(72.19,63.9) C7.1@72.19,64.5
  other v1: 39.125,39.3 43.125,39.3 47.125,39.3 51.125,39.3 55.125,39.3 59.125,39.3 63.125,39.3 67.125,39.3 39.125,55.3 43.125,55.3 47.125,55.3 51.125,55.3 55.125,55.3 59.125,55.3 63.125,55.3 67.125,55.3
-5V: C2.1 C4.1 C6.1 C8.1 J1.10 U1.3 U2.3 U3.3 U4.3 | length 89.1
  Top Layer w0.2: v1@35.798,63.912 35.798,68.073 40.65,72.925 53.35,72.925 55.175,74.75 55.675,74.75 v2(56.525,73.9) 57.5,72.925 71.365,72.925 v1(72.19,72.1) 72.19,70.903 70.375,69.088 70.375,58.687 72.19,56.872 v1(72.19,56.1) ; v1(35.81,47.9) 35.838,47.928 35.838,48.5 37.598,50.26 37.598,61.39 35.81,63.178 v1(35.81,63.9)
  Bottom Layer w0.25: C2.1@35.81,48.5 35.96,48.65 35.96,49.788 U1.3@36,49.828 ; C6.1@35.81,64.5 35.96,64.65 35.96,65.788 U3.3@36,65.828 ; U4.3@72,70.172 72.04,70.212 72.04,71.35 C8.1@72.19,71.5 ; U2.3@72.038,54.21 C4.1@72.038,55.348
  Bottom Layer w0.254: U2.3@72,54.172 U2.3@72.038,54.21 ; C4.1@72.038,55.348 C4.1@72.19,55.5
  Bottom Layer w0.6: v1@35.8,63.9 v1@35.805,63.905 ; v1(35.81,47.9) C2.1@35.81,48.5 ; v1(35.81,63.9) C6.1@35.81,64.5 ; J1.10@56.475,72.25 56.475,73.85 v2(56.525,73.9) ; C4.1@72.19,55.5 v1(72.19,56.1) ; C8.1@72.19,71.5 v1(72.19,72.1)
GND: C1.2 C1_CH1.1 C1_CH2.1 C1_CH3.1 C1_CH4.1 C2.2 C3.2 C4.2 C5.2 C6.2 C7.2 C8.2 J1.2 J1.4 J1.6 J1.9 J1.11 J1.13 U1.2 U1.9 U1_CH1.3 U1_CH2.3 U1_CH3.3 U1_CH4.3 U2.2 U2.9 U2_CH1.3 U2_CH2.3 U2_CH3.3 U2_CH4.3 U3.2 U3.9 U3_CH1.3 U3_CH2.3 U3_CH3.3 U3_CH4.3 U4.2 U4.9 U4_CH1.3 U4_CH2.3 U4_CH3.3 U4_CH4.3 U5_CH1.3 U5_CH2.3 U5_CH3.3 U5_CH4.3 U6_CH1.3 U6_CH2.3 U6_CH3.3 U6_CH4.3 U7_CH1.3 U7_CH2.3 U7_CH3.3 U7_CH4.3 U8_CH1.3 U8_CH2.3 U8_CH3.3 U8_CH4.3 U9_CH1.3 U9_CH2.3 U9_CH3.3 U9_CH4.3 U10_CH1.3 U10_CH2.3 U10_CH3.3 U10_CH4.3 U11_CH1.3 U11_CH2.3 U11_CH3.3 U11_CH4.3 U12_CH1.3 U12_CH2.3 U12_CH3.3 U12_CH4.3 U13_CH1.3 U13_CH2.3 U13_CH3.3 U13_CH4.3 U14_CH1.3 U14_CH2.3 U14_CH3.3 U14_CH4.3 U15_CH1.3 U15_CH2.3 U15_CH3.3 U15_CH4.3 U16_CH1.3 U16_CH2.3 U16_CH3.3 U16_CH4.3 U17_CH1.23 U17_CH1.24 U17_CH2.23 U17_CH2.24 U17_CH3.23 U17_CH3.24 U17_CH4.23 U17_CH4.24 | length 144.4
  Top Layer w0.2: v1(36.69,47.9) 36.69,48.89 37.925,50.125 37.925,61.525 36.69,62.76 v1(36.69,63.9) 36.125,64.465 36.125,67.938 40.762,72.575 54.1,72.575 v2(55.425,73.9) 56.75,72.575 70.833,72.575 v1(71.31,72.098) 71.31,70.485 70.048,69.223 70.048,58.552 71.31,57.29 v1(71.31,56.1) ; U1_CH1.3@40.5,39.23 40.5,39.2 v1@40.875,39.2 ; U5_CH1.3@40.5,43.23 41.578,43.23 42.125,42.683 v1(42.125,42.6) ; v1(40.5,46.6) U9_CH1.3@40.5,47.23 ; U13_CH1.3@40.5,51.23 40.5,51.225 v1(40.875,51.225) ; U1_CH3.3@40.5,55.23 40.5,55.2 v1@40.875,55.2 ; U5_CH3.3@40.5,59.23 41.578,59.23 42.125,58.683 v1(42.125,58.6) ; v1(40.5,62.6) U9_CH3.3@40.5,63.23 ; U13_CH3.3@40.5,67.23 40.5,67.225 v1(40.875,67.225) ; U2_CH1.3@44.5,39.23 44.5,39.216 v1@44.873,39.216 ; U6_CH1.3@44.5,43.23 44.5,43.225 v1(44.875,43.225) ; U10_CH1.3@44.5,47.23 44.5,47.285 v1(44.815,47.285) ; U14_CH1.3@44.5,51.23 44.5,51.455 44.621,51.455 44.95,51.784 44.95,51.815 45.061,51.926 v1(45.061,52.034) ; U2_CH3.3@44.5,55.23 44.5,55.216 v1@44.873,55.216 ; U6_CH3.3@44.5,59.23 44.5,59.225 v1(44.875,59.225) ; U10_CH3.3@44.5,63.23 44.5,63.285 v1(44.815,63.285) ; U14_CH3.3@44.5,67.23 44.5,67.455 44.621,67.455 44.95,67.784 44.95,67.815 45.061,67.926 v1(45.061,68.034) ; U3_CH1.3@48.5,39.23 48.5,39.225 v1@48.875,39.225 ; U7_CH1.3@48.5,43.23 48.5,43.225 v1(48.875,43.225) ; U11_CH1.3@48.5,47.23 48.5,47.005 48.666,46.839 48.798,46.839 v1(48.875,46.763) ; U15_CH1.3@48.5,51.23 48.5,51.329 v1(48.875,51.329) ; U3_CH3.3@48.5,55.23 48.5,55.225 v1@48.875,55.225 ; U7_CH3.3@48.5,59.23 48.5,59.225 v1(48.875,59.225) ; U11_CH3.3@48.5,63.23 48.5,63.005 48.666,62.839 48.798,62.839 v1(48.875,62.763) ; U15_CH3.3@48.5,67.23 48.5,67.329 v1(48.875,67.329) ; U4_CH1.3@52.5,39.23 52.5,39.2 v1@52.875,39.2 ; U8_CH1.3@52.5,43.23 52.5,43.225 v1(53.075,43.225) ; U12_CH1.3@52.5,47.23 52.5,47.225 v1(52.875,47.225) ; U16_CH1.3@52.5,51.23 52.5,51.225 v1(52.875,51.225) ; U4_CH3.3@52.5,55.23 52.5,55.2 v1@52.875,55.2 ; U8_CH3.3@52.5,59.23 52.5,59.225 v1(53.075,59.225) ; U12_CH3.3@52.5,63.23 52.5,63.225 v1(52.875,63.225) ; U16_CH3.3@52.5,67.23 52.5,67.225 v1(52.875,67.225) ; U1_CH2.3@56.5,39.23 56.5,39.2 v1@56.875,39.2 ; U5_CH2.3@56.5,43.23 57.578,43.23 58.125,42.683 v1(58.125,42.6) ; v1(56.5,46.6) U9_CH2.3@56.5,47.23 ; U13_CH2.3@56.5,51.23 56.5,51.225 v1(56.875,51.225) ; U1_CH4.3@56.5,55.23 56.5,55.2 v1@56.875,55.2 ; U5_CH4.3@56.5,59.23 57.578,59.23 58.125,58.683 v1(58.125,58.6) ; v1(56.5,62.6) U9_CH4.3@56.5,63.23 ; U13_CH4.3@56.5,67.23 56.5,67.225 v1(56.875,67.225) ; U2_CH2.3@60.5,39.23 60.5,39.216 v1@60.873,39.216 ; U6_CH2.3@60.5,43.23 60.5,43.225 v1(60.875,43.225) ; U10_CH2.3@60.5,47.23 60.5,47.285 v1(60.815,47.285) ; U14_CH2.3@60.5,51.23 60.5,51.455 60.621,51.455 60.95,51.784 60.95,51.815 61.061,51.926 v1(61.061,52.034) ; U2_CH4.3@60.5,55.23 60.5,55.334 v1(60.839,55.334) ; U6_CH4.3@60.5,59.23 60.5,59.225 v1(60.875,59.225) ; U10_CH4.3@60.5,63.23 60.5,63.285 v1(60.815,63.285) ; U14_CH4.3@60.5,67.23 60.5,67.455 60.621,67.455 60.95,67.784 60.95,67.815 61.061,67.926 v1(61.061,68.034) ; U3_CH2.3@64.5,39.23 64.5,39.225 v1@64.875,39.225 ; U7_CH2.3@64.5,43.23 64.5,43.225 v1(64.875,43.225) ; U11_CH2.3@64.5,47.23 64.5,47.005 64.666,46.839 64.798,46.839 v1(64.875,46.763) ; U15_CH2.3@64.5,51.23 64.5,51.329 v1(64.875,51.329) ; U3_CH4.3@64.5,55.23 64.5,55.225 v1@64.875,55.225 ; U7_CH4.3@64.5,59.23 64.5,59.225 v1(64.875,59.225) ; U11_CH4.3@64.5,63.23 64.5,63.005 64.666,62.839 64.798,62.839 v1(64.875,62.763) ; U15_CH4.3@64.5,67.23 64.5,67.329 v1(64.875,67.329) ; U4_CH2.3@68.5,39.23 68.5,39.2 v1@68.875,39.2 ; U8_CH2.3@68.5,43.23 68.5,43.225 v1(69.075,43.225) ; U12_CH2.3@68.5,47.23 68.5,47.225 v1(68.875,47.225) ; U16_CH2.3@68.5,51.23 68.5,51.225 v1(68.875,51.225) ; U4_CH4.3@68.5,55.23 68.5,55.2 v1@68.875,55.2 ; U8_CH4.3@68.5,59.23 68.5,59.225 v1(69.075,59.225) ; U12_CH4.3@68.5,63.23 68.5,63.225 v1(68.875,63.225) ; U16_CH4.3@68.5,67.23 68.5,67.225 v1(68.875,67.225)
  Bottom Layer w0.2: U17_CH1.24@43.21,41.825 43.24,41.854 U17_CH1.24@43.24,41.875 ; U17_CH3.24@43.21,57.825 43.24,57.854 U17_CH3.24@43.24,57.875 ; U17_CH2.24@59.21,41.825 59.24,41.854 U17_CH2.24@59.24,41.875 ; U17_CH4.24@59.21,57.825 59.24,57.854 U17_CH4.24@59.24,57.875
  Bottom Layer w0.25: U1.2@36.5,49.828 36.54,49.788 36.54,48.65 C2.2@36.69,48.5 ; U1.9@36.5,54.172 36.54,54.212 36.54,55.35 C1.2@36.69,55.5 ; U3.2@36.5,65.828 36.54,65.788 36.54,64.65 C6.2@36.69,64.5 ; U3.9@36.5,70.172 36.54,70.212 36.54,71.35 C5.2@36.69,71.5 ; J1.2@48.475,72.25 J1.2@48.5,72.275 ; J1.11@57.475,72.25 J1.11@57.513,72.287 ; J1.13@59.475,72.25 J1.13@59.488,72.262 ; C4.2@71.31,55.5 71.46,55.35 71.46,54.212 U2.2@71.462,54.21 ; C7.2@71.31,64.5 71.46,64.65 71.46,65.788 U4.9@71.5,65.828 ; C8.2@71.31,71.5 71.46,71.35 71.46,70.212 U4.2@71.5,70.172 ; C3.2@71.462,48.652 U2.9@71.462,49.79
  Bottom Layer w0.254: C3.2@71.31,48.5 C3.2@71.462,48.652 ; U2.9@71.462,49.79 U2.9@71.5,49.828 ; U2.2@71.462,54.21 U2.2@71.5,54.172
  Bottom Layer w0.6: v1(36.69,47.9) C2.2@36.69,48.5 ; C1.2@36.69,55.5 v1(36.69,56.1) ; v1(36.69,63.9) C6.2@36.69,64.5 ; C5.2@36.69,71.5 v1(36.69,72.1) ; v1(42.8,41.885) U17_CH1.24@43.25,41.885 ; v1(42.8,57.885) U17_CH3.24@43.25,57.885 ; J1.2@48.475,72.25 v2(48.475,73.9) ; v1(49.47,40.2) C1_CH1.1@49.47,40.8 ; v1(49.47,56.2) C1_CH3.1@49.47,56.8 ; v2(50.475,70.6) J1.4@50.475,72.25 ; J1.6@52.475,72.25 52.475,73.85 v2(52.525,73.9) ; v2(55.425,73.9) 55.475,73.85 J1.9@55.475,72.25 ; v2(57.475,70.6) J1.11@57.475,72.25 ; v1(58.8,41.885) U17_CH2.24@59.25,41.885 ; v1(58.8,57.885) U17_CH4.24@59.25,57.885 ; J1.13@59.475,72.25 v2(59.475,73.904) ; v1(65.47,40.2) C1_CH2.1@65.47,40.8 ; v1(65.47,56.2) C1_CH4.1@65.47,56.8 ; v1(71.31,47.9) C3.2@71.31,48.5 ; C4.2@71.31,55.5 v1(71.31,56.1) ; v1(71.31,63.9) C7.2@71.31,64.5 ; C8.2@71.31,71.5 v1(71.31,72.098)
  other v1: 40.875,39.3 44.873,39.3 48.875,39.3 52.875,39.3 56.875,39.3 60.873,39.3 64.875,39.3 68.875,39.3 40.875,55.3 44.873,55.3 48.875,55.3 52.875,55.3 56.875,55.3 64.875,55.3 68.875,55.3
NetU1_1: U1.1 U17_CH1.41 | length 15.2
  Bottom Layer w0.2: U1.1@37,49.828 37,52.395 38.83,54.225 43.7,54.225 45.725,52.2 45.725,51.675 45.25,51.2 U17_CH1.41@45.25,50.115
NetU1_4: U1.4 U2.4 U3.4 U4.4 | length 107.2
  Top Layer w0.2: v1(35.271,67.45) 35.283,67.438 35.283,51.567 v1(35.3,51.55) 35.283,51.533 35.283,38.517 36.325,37.475 72.225,37.475 73.1,38.35 73.1,49.65 71.625,51.125 v1(71.625,52.625) 72.925,53.925 72.925,64.525 71.65,65.8 v1(71.65,68.775)
  Bottom Layer w0.2: v1(35.271,67.45) 35.271,67.342 35.5,67.113 U3.4@35.5,65.828 ; v1(35.3,51.55) 35.3,51.442 35.5,51.242 U1.4@35.5,49.828 ; v1(71.625,52.625) 71.702,52.702 72.061,52.702 72.435,53.076 72.435,54.107 U2.4@72.5,54.172 ; v1(71.65,68.775) 71.71,68.775 72.104,69.169 72.246,69.169 72.435,69.358 72.435,70.107 U4.4@72.5,70.172
NetU1_5: U1.5 U2.5 U3.5 U4.5 | length 108.8
  Top Layer w0.2: v1(34.325,67.25) 34.325,60.801 34.802,60.324 34.802,51.927 34.483,51.608 34.375,51.608 34.375,38.75 36.6,36.525 72.45,36.525 73.8,37.875 73.8,51.375 v1(72.65,52.525) 72.65,52.586 73.252,53.188 73.252,64.66 72.675,65.237 v1(72.675,68.725)
  Bottom Layer w0.2: v1(34.325,67.25) 34.399,67.176 34.399,66.876 34.785,66.49 34.935,66.49 35,66.425 U3.5@35,65.828 ; v1(34.375,51.5) 34.452,51.423 34.452,50.974 35,50.425 U1.5@35,49.828 ; v1(72.65,52.525) 72.65,52.633 73,52.983 U2.5@73,54.172 ; v1(72.675,68.725) 72.675,68.785 73,69.11 U4.5@73,70.172
NetU1_10: U1.10 U17_CH1.43 | length 12.8
  Bottom Layer w0.2: U1.10@37,54.172 37,54.56 37.065,54.625 43.875,54.625 46.1,52.4 46.1,51.075 46.21,50.965 46.21,50.154 U17_CH1.43@46.25,50.115
NetU1_CH1_4: U1_CH1.4 U17_CH1.12 | length 10.8
  Top Layer w0.2: U1_CH1.4@40.508,40.762 40.862,40.762 41.375,41.275 43.045,41.275 44.37,42.6 v1(49.825,42.6)
  Bottom Layer w0.2: v1(49.825,42.6) 49.825,42.612 50.115,42.902 U17_CH1.12@50.115,43.25
NetU1_CH1_6: U1_CH1.6 U17_CH1.25 | length 4.3
  Top Layer w0.2: U1_CH1.6@39.5,40.77 39.5,41.32 40.53,42.35 v1(41.2,42.35)
  Bottom Layer w0.2: v1(41.2,42.35) 41.123,42.427 41.123,43.085 41.288,43.25 U17_CH1.25@41.885,43.25
NetU1_CH2_4: U1_CH2.4 U17_CH2.12 | length 10.8
  Top Layer w0.2: U1_CH2.4@56.508,40.762 56.862,40.762 57.375,41.275 59.045,41.275 60.37,42.6 v1(65.825,42.6)
  Bottom Layer w0.2: v1(65.825,42.6) 65.825,42.612 66.115,42.902 U17_CH2.12@66.115,43.25
NetU1_CH2_6: U1_CH2.6 U17_CH2.25 | length 4.3
  Top Layer w0.2: U1_CH2.6@55.5,40.77 55.5,41.32 56.53,42.35 v1(57.2,42.35)
  Bottom Layer w0.2: v1(57.2,42.35) 57.123,42.427 57.123,43.085 57.288,43.25 U17_CH2.25@57.885,43.25
NetU1_CH3_4: U1_CH3.4 U17_CH3.12 | length 10.8
  Top Layer w0.2: U1_CH3.4@40.508,56.762 40.862,56.762 41.375,57.275 43.045,57.275 44.37,58.6 v1(49.825,58.6)
  Bottom Layer w0.2: v1(49.825,58.6) 49.825,58.612 50.115,58.902 U17_CH3.12@50.115,59.25
NetU1_CH3_6: U1_CH3.6 U17_CH3.25 | length 4.3
  Top Layer w0.2: U1_CH3.6@39.5,56.77 39.5,57.32 40.53,58.35 v1(41.2,58.35)
  Bottom Layer w0.2: v1(41.2,58.35) 41.123,58.427 41.123,59.085 41.288,59.25 U17_CH3.25@41.885,59.25
NetU1_CH4_4: U1_CH4.4 U17_CH4.12 | length 10.8
  Top Layer w0.2: U1_CH4.4@56.508,56.762 56.862,56.762 57.375,57.275 59.045,57.275 60.37,58.6 v1(65.825,58.6)
  Bottom Layer w0.2: v1(65.825,58.6) 65.825,58.612 66.115,58.902 U17_CH4.12@66.115,59.25
NetU1_CH4_6: U1_CH4.6 U17_CH4.25 | length 4.3
  Top Layer w0.2: U1_CH4.6@55.5,56.77 55.5,57.32 56.53,58.35 v1(57.2,58.35)
  Bottom Layer w0.2: v1(57.2,58.35) 57.123,58.427 57.123,59.085 57.288,59.25 U17_CH4.25@57.885,59.25
NetU2_1: U2.1 U17_CH2.41 | length 13.1
  Bottom Layer w0.2: U17_CH2.41@61.25,50.115 61.25,51.2 61.725,51.675 61.725,53.2 62.45,53.925 70.935,53.925 U2.1@71,53.99 ; U2.1@70.935,53.95 71,54.015 U2.1@71,54.172
NetU2_10: U2.10 U17_CH2.43 | length 15.1
  Bottom Layer w0.2: U17_CH2.43@62.25,50.115 62.21,50.154 62.21,50.965 62.1,51.075 62.1,52.975 62.65,53.525 69.895,53.525 71,52.42 U2.10@71,49.828
NetU2_CH1_4: U2_CH1.4 U17_CH1.11 | length 9.5
  Top Layer w0.2: U2_CH1.4@44.508,40.762 44.508,40.987 44.869,41.348 49.538,41.348 50.74,42.55 v1(50.8,42.55)
  Bottom Layer w0.2: U17_CH1.11@50.115,43.75 50.154,43.71 50.865,43.71 51.284,43.291 51.284,43.034 v1(50.8,42.55)
NetU2_CH1_6: U2_CH1.6 U17_CH1.26 | length 6.5
  Top Layer w0.2: v1(42.575,40.577) 43.5,40.577 43.5,40.545 U2_CH1.6@43.5,40.77
  Bottom Layer w0.2: U17_CH1.26@41.885,43.75 41.288,43.75 41.249,43.71 41.148,43.71 40.575,43.137 40.575,42.05 42.125,40.5 ; 42.125,40.5 42.498,40.5 v1(42.575,40.577)
NetU2_CH2_4: U2_CH2.4 U17_CH2.11 | length 9.5
  Top Layer w0.2: U2_CH2.4@60.508,40.762 60.508,40.987 60.869,41.348 65.538,41.348 66.74,42.55 v1(66.8,42.55)
  Bottom Layer w0.2: U17_CH2.11@66.115,43.75 66.154,43.71 66.865,43.71 67.284,43.291 67.284,43.034 v1(66.8,42.55)
NetU2_CH2_6: U2_CH2.6 U17_CH2.26 | length 6.5
  Top Layer w0.2: v1(58.575,40.577) 59.5,40.577 59.5,40.545 U2_CH2.6@59.5,40.77
  Bottom Layer w0.2: U17_CH2.26@57.885,43.75 57.288,43.75 57.249,43.71 57.148,43.71 56.575,43.137 56.575,42.05 58.125,40.5 58.498,40.5 v1(58.575,40.577)
NetU2_CH3_4: U2_CH3.4 U17_CH3.11 | length 9.5
  Top Layer w0.2: U2_CH3.4@44.508,56.762 44.508,56.987 44.869,57.348 49.538,57.348 50.74,58.55 v1(50.8,58.55)
  Bottom Layer w0.2: U17_CH3.11@50.115,59.75 50.154,59.71 50.865,59.71 51.284,59.291 51.284,59.034 v1(50.8,58.55)
NetU2_CH3_6: U2_CH3.6 U17_CH3.26 | length 6.5
  Top Layer w0.2: v1(42.575,56.577) 43.5,56.577 43.5,56.545 U2_CH3.6@43.5,56.77
  Bottom Layer w0.2: U17_CH3.26@41.885,59.75 41.288,59.75 41.249,59.71 41.148,59.71 40.575,59.137 40.575,58.05 42.125,56.5 ; 42.125,56.5 42.498,56.5 v1(42.575,56.577)
NetU2_CH4_4: U2_CH4.4 U17_CH4.11 | length 9.5
  Top Layer w0.2: U2_CH4.4@60.508,56.762 60.508,56.987 60.869,57.348 65.538,57.348 66.74,58.55 v1(66.8,58.55)
  Bottom Layer w0.2: U17_CH4.11@66.115,59.75 66.154,59.71 66.865,59.71 67.284,59.291 67.284,59.034 v1(66.8,58.55)
NetU2_CH4_6: U2_CH4.6 U17_CH4.26 | length 6.5
  Top Layer w0.2: v1(58.575,56.577) 59.5,56.577 59.5,56.545 U2_CH4.6@59.5,56.77
  Bottom Layer w0.2: U17_CH4.26@57.885,59.75 57.288,59.75 57.249,59.71 57.148,59.71 56.575,59.137 56.575,58.05 58.125,56.5 ; 58.125,56.5 58.498,56.5 v1(58.575,56.577)
NetU3_1: U3.1 U17_CH3.41 | length 15.1
  Bottom Layer w0.2: U3.1@37,65.828 37,68.395 38.803,70.198 43.727,70.198 45.7,68.225 ; U17_CH3.41@45.25,66.115 45.25,67.2 45.725,67.675 45.725,68.225
NetU3_10: U3.10 U17_CH3.43 | length 12.8
  Bottom Layer w0.2: U3.10@37,70.172 37,70.56 37.065,70.625 43.875,70.625 46.1,68.4 46.1,67.075 46.21,66.965 46.21,66.154 U17_CH3.43@46.25,66.115
NetU3_CH1_4: U3_CH1.4 U17_CH1.10 | length 6.8
  Top Layer w0.2: U3_CH1.4@48.508,40.762 48.508,40.925 49.992,40.925 50.442,41.375 v1(50.55,41.375)
  Bottom Layer w0.2: U17_CH1.10@50.115,44.25 50.154,44.21 50.965,44.21 51.623,43.552 51.623,42.448 v1(50.55,41.375)
NetU3_CH1_6: U3_CH1.6 U17_CH1.27 | length 12.1
  Top Layer w0.2: v1(45.175,40.025) 45.942,40.025 46.687,40.77 U3_CH1.6@47.5,40.77
  Bottom Layer w0.2: U17_CH1.27@41.885,44.25 41.845,44.21 40.985,44.21 40.2,43.425 40.2,41.8 42.05,39.95 45.1,39.95 v1(45.175,40.025)
NetU3_CH2_4: U3_CH2.4 U17_CH2.10 | length 6.8
  Top Layer w0.2: U3_CH2.4@64.508,40.762 64.508,40.925 65.992,40.925 66.442,41.375 v1(66.55,41.375)
  Bottom Layer w0.2: U17_CH2.10@66.115,44.25 66.154,44.21 66.965,44.21 67.623,43.552 67.623,42.448 v1(66.55,41.375)
NetU3_CH2_6: U3_CH2.6 U17_CH2.27 | length 12.1
  Top Layer w0.2: v1(61.175,40.025) 61.942,40.025 62.687,40.77 U3_CH2.6@63.5,40.77
  Bottom Layer w0.2: U17_CH2.27@57.885,44.25 57.845,44.21 56.985,44.21 56.2,43.425 56.2,41.8 58.05,39.95 61.1,39.95 v1(61.175,40.025)
NetU3_CH3_4: U3_CH3.4 U17_CH3.10 | length 6.8
  Top Layer w0.2: U3_CH3.4@48.508,56.762 48.508,56.925 49.992,56.925 50.442,57.375 v1(50.55,57.375)
  Bottom Layer w0.2: U17_CH3.10@50.115,60.25 50.154,60.21 50.965,60.21 51.623,59.552 51.623,58.448 v1(50.55,57.375)